# Altium PCB Remote_Control.PcbDoc
Units mil, origin at the board's own origin, x right, y up, seen from the top; angles counter-clockwise.
Board outline 6000 x 3000 mil, 4 copper layers (Top Layer, 3V3 Plane, GND Plane, Bottom Layer), stack 30.634 mil thick; 109 components, 80 nets, 428 pads, 143 vias.
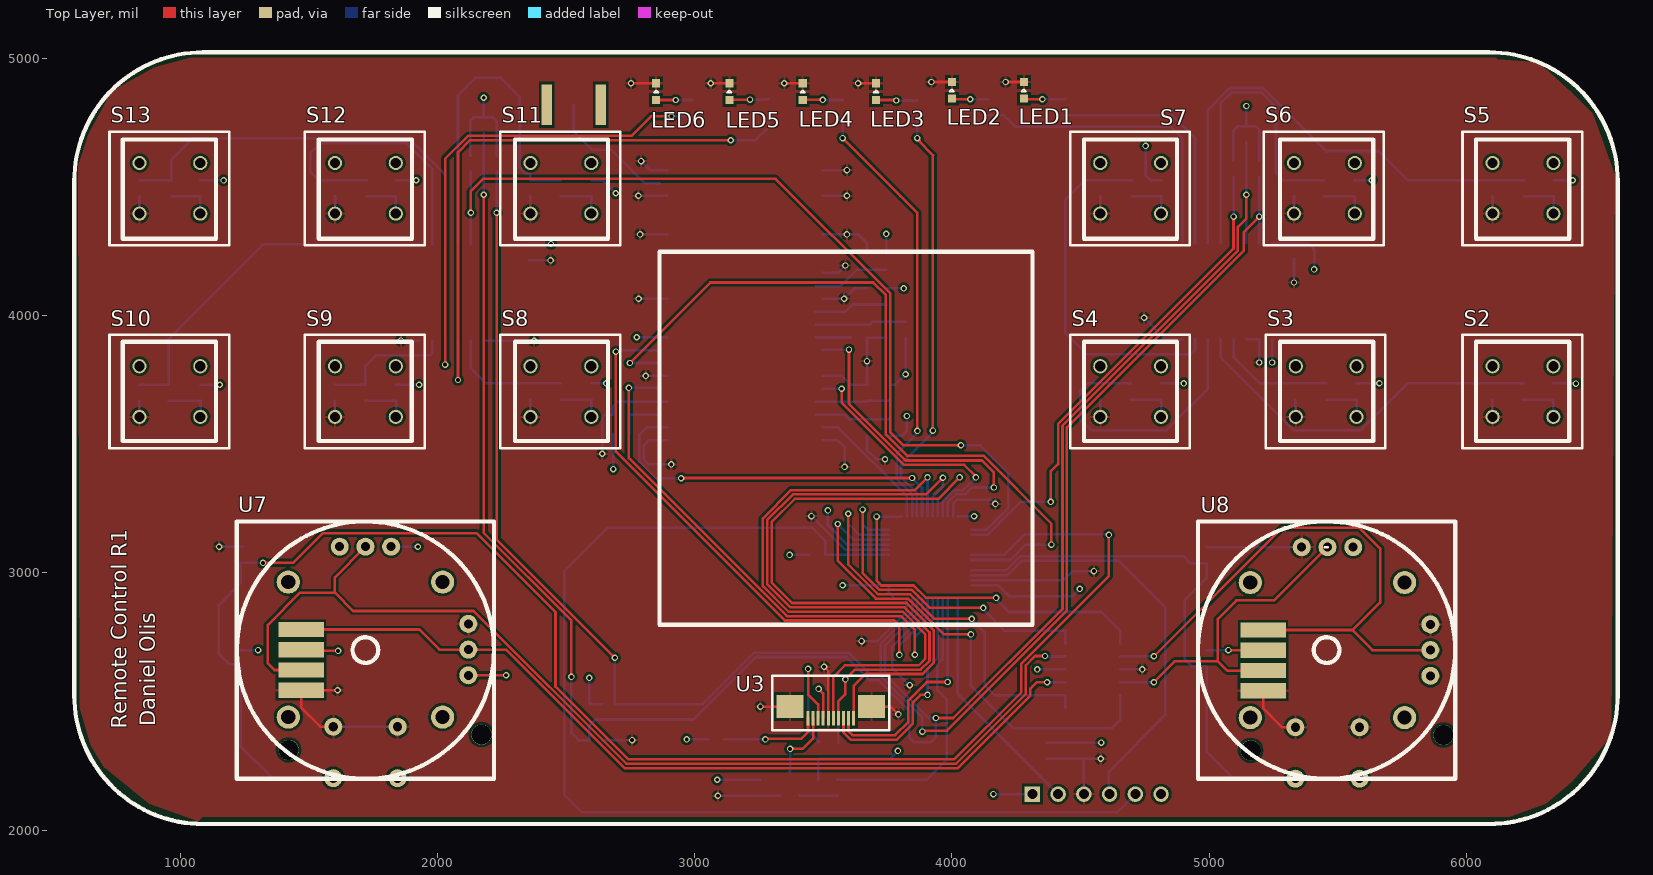
[diagram p0: Top Layer view]
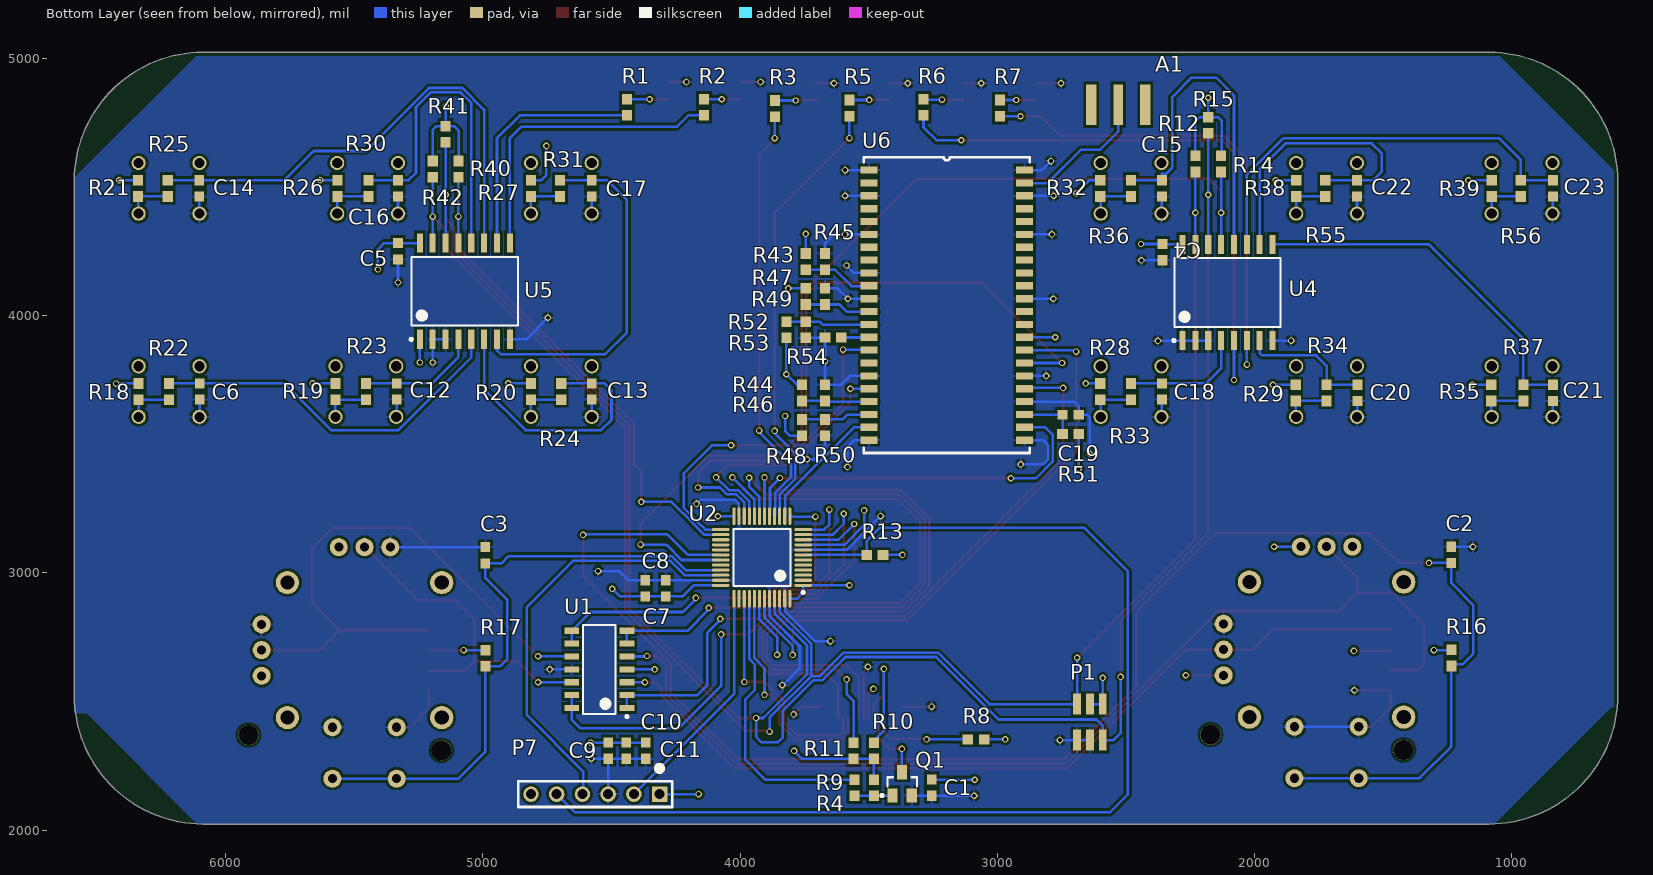
[diagram p1: Bottom Layer view, seen from below]
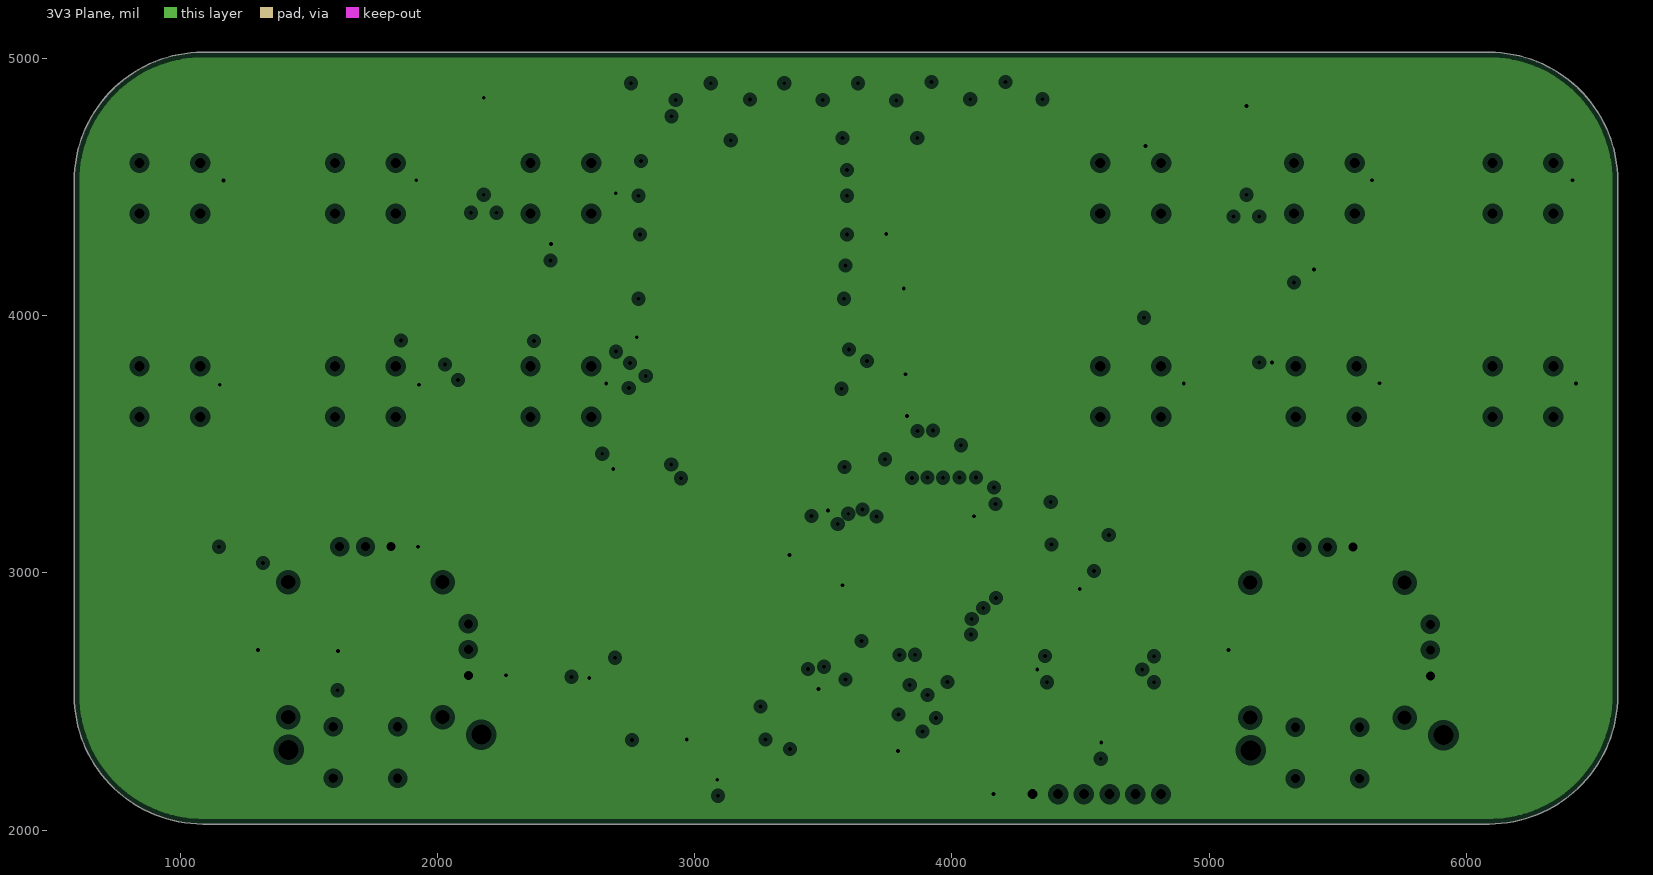
[diagram p2: 3V3 Plane, clearances drawn from the general rule]
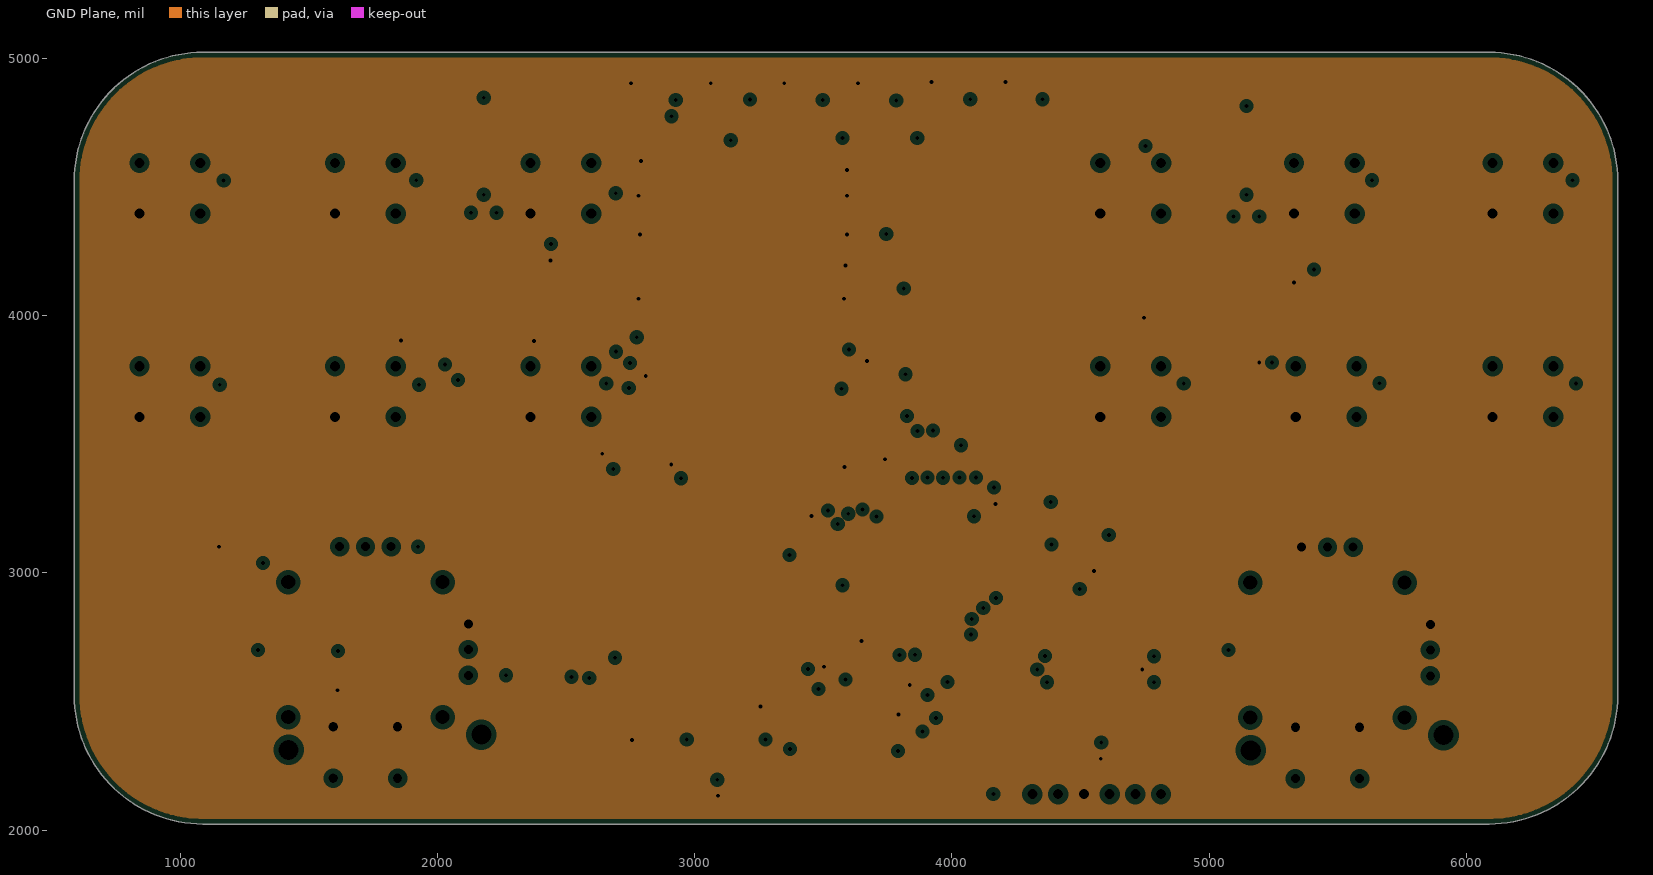
[diagram p3: GND Plane, clearances drawn from the general rule]

## Layer stack, top to bottom
Top Solder: solder mask 0.4, Solder Resist, Dk 3.5
Top Layer: signal copper 1.4
Dielectric 1: core 10, FR-4, Dk 4.2
3V3 Plane: plane copper 1.417, net 3V3
Dielectric 3: prepreg 5, Dk 4.2
GND Plane: plane copper 1.417, net GND
Dielectric 2: core 10, Dk 4.2
Bottom Layer: signal copper 1.4
Bottom Solder: solder mask 0.4, Solder Resist, Dk 3.5

## Board outline
1088.28,2023.84 cw(c1088.28,2523.84) 588.28,2523.84 588.28,4523.84 cw(c1088.28,4523.84) 1088.28,5023.84 6088.28,5023.84 cw(c6088.28,4523.84) 6588.28,4523.84 6588.28,2523.84 cw(c6088.28,2523.84) 6088.28,2023.84

## Design rules (kind name [scope] priority, off if disabled: settings)
Clearance [All] p1: gap=10 ignorepadtopadclearanceinfootprint=FALSE except(0: Arc-Hole Track-Hole SMDPad-Hole THPad-Hole Via-Hole Fill-Hole Poly-Hole Region-Hole Text-Hole; 7: Arc-Arc Arc-Track Arc-SMDPad Track-Track Track-SMDPad SMDPad-SMDPad)
Height [All] p1: minheight=0 maxheight=2000 prefheight=500
PlaneClearance [All] p1: clearance=20
PlaneConnect [All] p1: planeconnectstyle=Relief reliefexpansion=20 reliefentries=4 reliefconductorwidth=10 reliefairgap=10
PolygonConnect [All] p1: connectstyle=Relief reliefconductorwidth=10 reliefentries=4 polygonreliefangle="90 Angle" airgapwidth=10
RoutingVias [All] p1: holewidth=15 width=25 viastyle="Through Hole" minholewidth=15 minwidth=25 maxholewidth=28 maxwidth=50
SolderMaskExpansion [All] p1: expansion=4
Width [All] p1: maxlimit=10 minlimit=10 preferedwidth=10
27 further rules are at their usual default settings.

## Classes and differential pairs
component class U_Remote_Control: C4 C5 C7 C8 C9 C10 C11 P7 R12 R13 R14 R15 R40 R41 R42 U2 U4 U5
component class "U_Radio Module": A1 C19 R43 R44 R45 R46 R47 R48 R49 R50 R51 R52 R53 R54 U6
component class U_Power: P1
component class U_Outputs: C1 LED1 LED2 LED3 LED4 LED5 LED6 Q1 R1 R2 R3 R4 R5 R6 R7 R8 R9 R10 R11 U3
component class U_Inputs: C2 C3 R16 R17 U1 U7 U8
component class U_Buttons: C6 C12 C13 C14 C15 C16 C17 C18 C20 C21 C22 C23 R18 R19 R20 R21 R22 R23 R24 R25 R26 R27 R28 R29 R30 R31 R32 R33 R34 R35 R36 R37 R38 R39 R55 R56 S2 S3 S4 S5 S6 S7 S8 S9 S10 S11 S12 S13

## Components (designator, comment, footprint, x,y, rotation, side; value= is the part's Value field where it differs from the comment)
A1 "CON-SMA-EDGE-S" CON-SMA-EDGE-S 2530,4820 r180 bottom
C1 "Cap" CAPC0603 3255,2165 r270 bottom value=100nF
C2 "Cap" CAPC0603 1235,3070.39 r90 bottom value=100nF
C3 "Cap" CAPC0603 4990,3068.5 r90 bottom value=100nF
C4 "Cap" CAPC0603 2358,4247 r270 bottom value=100nF
C5 "Cap" CAPC0603 5330,4250.51 r270 bottom value=100nF
C6 "Cap" CAPC0603 6100,3705 r270 bottom value=100nF
C7 "Cap" CAPC0603 4368,2940 r90 bottom value=100nF
C8 "Cap" CAPC0603 4289,2940 r90 bottom value=10nF
C9 "Cap" CAPC0603 4512,2309 r270 bottom value=100nF
C10 "Cap" CAPC0603 4442,2309 r270 bottom value=100nF
C11 "Cap" CAPC0603 4367,2309 r270 bottom value=100nF
C12 "Cap" CAPC0603 5335,3705 r270 bottom value=100nF
C13 "Cap" CAPC0603 4576.89,3705 r270 bottom value=100nF
C14 "Cap" CAPC0603 6101.89,4495 r270 bottom value=100nF
C15 "Cap" CAPC0603 2360,4495 r270 bottom value=100nF
C16 "Cap" CAPC0603 5330,4495 r270 bottom value=100nF
C17 "Cap" CAPC0603 4576.89,4495 r270 bottom value=100nF
C18 "Cap" CAPC0603 2360,3705 r270 bottom value=100nF
C19 "Cap" CAPC0603 2715,3615 r180 bottom value=10uF
C20 "Cap" CAPC0603 1600,3700 r270 bottom value=100nF
C21 "Cap" CAPC0603 840,3700 r270 bottom value=100nF
C22 "Cap" CAPC0603 1601.89,4495 r270 bottom value=100nF
C23 "Cap" CAPC0603 840,4495 r270 bottom value=100nF
LED1 "LED" LED0603 4280,4875.98 r90 top
LED2 "LED" LED0603 4000,4875.98 r90 top
LED3 "LED" LED0603 3705,4870.98 r90 top
LED4 "LED" LED0603 3420,4870.98 r90 top
LED5 "LED" LED0603 3135,4870.98 r90 top
LED6 "LED" LED0603 2850,4870.98 r90 top
P1 "Amphenol 20021321-00006C4LF" "Amphenol FCI 20021321-00006C4LF - duplicate" 2640,2420 r270 bottom
P7 "SWD" SWD_STM32 4313,2140 r270 bottom
Q1 "MMBT3904" MMBT3904 3370,2180 r90 bottom
R1 "Res" RES0603 4440,4810 r90 bottom value=73R2
R2 "Res" RES0603 4140,4810 r90 bottom value=73R2
R3 "Res" RES0603 3865,4805 r90 bottom value=73R2
R4 "Res" RES0603 3480,2308.5 r270 bottom value=DNI
R5 "Res" RES0603 3575,4807.01 r90 bottom value=73R2
R6 "Res" RES0603 3287.01,4810 r90 bottom value=73R2
R7 "Res" RES0603 2990,4807.01 r90 bottom value=73R2
R8 "Res" RES0603 3083,2353 r0 bottom value=6R8
R9 "Res" RES0603 3558.74,2308.5 r270 bottom value=10k
R10 "Res" RES0603 3480,2165 r90 bottom value=100k
R11 "Res" RES0603 3555,2165 r270 bottom value=4k7
R12 "Res" RES0603 2230,4590 r90 bottom value=1k
R13 "Res" RES0603 3476,3070 r0 bottom value=1k
R14 "Res" RES0603 2130,4590 r270 bottom value=1k
R15 "Res" RES0603 2180,4740 r270 bottom value=1k
R16 "Res" RES0603 1235,2669.76 r90 bottom value=10k
R17 "Res" RES0603 4990,2668.5 r90 bottom value=10k
R18 "Res" RES0603 6338.11,3705 r270 bottom value=10k
R19 "Res" RES0603 5573.11,3705 r270 bottom value=10k
R20 "Res" RES0603 4813.11,3705 r270 bottom value=10k
R21 "Res" RES0603 6340,4495 r270 bottom value=10k
R22 "Res" RES0603 6220,3705 r90 bottom value=10k
R23 "Res" RES0603 5455,3705 r90 bottom value=10k
R24 "Res" RES0603 4695,3705 r90 bottom value=10k
R25 "Res" RES0603 6225,4495 r90 bottom value=10k
R26 "Res" RES0603 5565,4495 r270 bottom value=10k
R27 "Res" RES0603 4813.11,4495 r270 bottom value=10k
R28 "Res" RES0603 2600,3705 r270 bottom value=10k
R29 "Res" RES0603 1840,3700 r270 bottom value=10k
R30 "Res" RES0603 5445,4495 r90 bottom value=10k
R31 "Res" RES0603 4700,4495 r90 bottom value=10k
R32 "Res" RES0603 2600,4495 r270 bottom value=10k
R33 "Res" RES0603 2480,3705 r90 bottom value=10k
R34 "Res" RES0603 1720,3700 r90 bottom value=10k
R35 "Res" RES0603 1080,3700 r270 bottom value=10k
R36 "Res" RES0603 2480,4495 r90 bottom value=10k
R37 "Res" RES0603 955,3700 r90 bottom value=10k
R38 "Res" RES0603 1838.11,4495 r270 bottom value=10k
R39 "Res" RES0603 1078.11,4495 r270 bottom value=10k
R40 "Res" RES0603 5095,4570 r270 bottom value=1k
R41 "Res" RES0603 5145,4705 r270 bottom value=1k
R42 "Res" RES0603 5195,4570 r90 bottom value=1k
R43 "Res" RES0603 3745,4210 r270 bottom value=DNP
R44 "Res" RES0603 3760,3700 r270 bottom value=DNP
R45 "Res" RES0603 3670,4210 r90 bottom value=DNP
R46 "Res" RES0603 3670,3700 r90 bottom value=DNP
R47 "Res" RES0603 3745,4075 r270 bottom value=DNP
R48 "Res" RES0603 3760,3565 r90 bottom value=DNP
R49 "Res" RES0603 3670,4075 r90 bottom value=DNP
R50 "Res" RES0603 3670,3565 r270 bottom value=DNP
R51 "Res" RES0603 2715,3540 r180 bottom value=10R
R52 "Res" RES0603 3820,3945 r90 bottom value=DNP
R53 "Res" RES0603 3745,3945 r270 bottom value=DNP
R54 "Res" RES0603 3638.5,3915 r180 bottom value=DNP
R55 "Res" RES0603 1725,4495 r90 bottom value=10k
R56 "Res" RES0603 965,4495 r90 bottom value=10k
S2 "PVA1 OA H2 1.2N V2" "PVA1 OA H2 1.2N V2" 6220,3705 r0 top
S3 "PVA1 OA H2 1.2N V2" "PVA1 OA H2 1.2N V2" 5455,3705 r0 top
S4 "PVA1 OA H2 1.2N V2" "PVA1 OA H2 1.2N V2" 4695,3705 r0 top
S5 "PVA1 OA H2 1.2N V2" "PVA1 OA H2 1.2N V2" 6220,4495 r0 top
S6 "PVA1 OA H2 1.2N V2" "PVA1 OA H2 1.2N V2" 5448.11,4495 r0 top
S7 "PVA1 OA H2 1.2N V2" "PVA1 OA H2 1.2N V2" 4695,4495 r0 top
S8 "PVA1 OA H2 1.2N V2" "PVA1 OA H2 1.2N V2" 2480,3705 r0 top
S9 "PVA1 OA H2 1.2N V2" "PVA1 OA H2 1.2N V2" 1720,3705 r0 top
S10 "PVA1 OA H2 1.2N V2" "PVA1 OA H2 1.2N V2" 960,3705 r0 top
S11 "PVA1 OA H2 1.2N V2" "PVA1 OA H2 1.2N V2" 2480,4495 r0 top
S12 "PVA1 OA H2 1.2N V2" "PVA1 OA H2 1.2N V2" 1720,4495 r0 top
S13 "PVA1 OA H2 1.2N V2" "PVA1 OA H2 1.2N V2" 960,4495 r0 top
U1 "MCP6L04" MCP6L04T-E/SL 4737.28,2631 r0 bottom
U2 "STM32F072CB" STM32F072CB 3915,3060 r0 bottom
U3 "SFV10R-2STE1HLF" SFV10R-2STE1HLF 3529.21,2503.9 r180 top
U4 "TCA9534DWT" TCA9534DWT 2105,4090 r90 bottom
U5 "TCA9534DWT" TCA9534DWT 5070,4095 r90 bottom
U6 "TRM-900-NT" TRM-900-NT 3499,4566 r180 bottom
U7 "COM-09032" JOYSTICK 1770.12,2661.89 r90 top
U8 "COM-09032" JOYSTICK 5510,2660 r90 top

## Footprints (in the part's own frame and the unit in brackets; to place one, negate y for a bottom-side part, rotate by r counter-clockwise, add the part's x,y. Pads: shape width x height; smd on the part's side, far side on the other; paste and mask are expansions set on the pad)
"Amphenol FCI 20021321-00006C4LF - duplicate" [mm] "6 Position Receptacle Connector"
  rect 2.05x0.76 smd: 1(-1.775,1.27) 2(-1.775,0) 3(-1.775,-1.27) 4(1.775,1.27) 5(1.775,0) 6(1.775,-1.27)
  body extent -2.3,-2.11 2.2,2.16, height 4.51
CAPC0603 [mm] "Chip Capacitor, 2-Leads, Body 1.60x0.80mm, IPC Medium Density"
  rect 1x0.95 smd: 1(-0.8,0) 2(0.8,0)
  body extent -0.88,-0.48 0.87,0.48, height 0.8
CON-SMA-EDGE-S [mm] "CONN SMA JACK STR EDGE MNT"
  rect 0.96x4 smd: 0(0,0)
  rect 1.01x4 smd far side: 1(-2.667,0) 1(2.667,0)
  rect 1.01x4 smd: 1(-2.667,0) 1(2.667,0)
  body extent -3.18,-2.26 3.2,5.13, height 6.35
JOYSTICK [mil] "Footprint for COM-09426 and COM-09032"
  round 70 / inner round 60 / far side round 70 hole 35: 1(-60,-350) 1(440,-50) 2(140,-350) 2(440,150) 3(40,-350) 4(440,50)
  rect 59.06x177.17 smd: 1(39.37,300.12) 2(-118.11,300.12) 3(118.11,300.12) 4(-39.37,300.12)
  round 70 / inner round 60 / far side round 70 hole 35.43: 5(-260,-75) 5(-260,175) 6(-460,-75) 6(-460,175)
  round 78.74 hole 78.74 unplated: 7(-350,348.74) 7(-290.35,-401.06)
  round 90 / inner round 60 / far side round 90 hole 55: 7(-222.5,350) 7(-222.5,-250) 7(302.5,-250) 7(302.5,350)
  body extent -495,-472 592,578, height 1190
LED0603 [mm] "Chip LED, 2-Leads, Body 1.60x0.80mm, IPC Medium Density"
  rect 0.8x0.8 smd: A(-0.825,0) C(0.825,0)
  silkscreen extent -0.13,-0.25 0.12,0.25, body extent -0.88,-0.48 0.87,0.47, height 0.8
MCP6L04T-E/SL [mm] "IC OPAMP GP 1MHZ RRO 14SOIC"
  rect 1.45x0.6 smd: 1(-7.551,3.962) 2(-7.551,2.692) 3(-7.551,1.422) 4(-7.551,0.152) 5(-7.551,-1.118) 6(-7.551,-2.388) 7(-7.551,-3.658) 8(-2.101,-3.658) 9(-2.101,-2.388) 10(-2.101,-1.118) 11(-2.101,0.152) 12(-2.101,1.422) 13(-2.101,2.692) 14(-2.101,3.962)
  silkscreen extent -7.68,-4.25 -3.23,4.94, body extent -6.83,-4.25 -2.83,4.55, height 1.75
MMBT3904 [mm] "SOT23, 3-Leads, Body 2.92x2.40mm, Pitch 0.95mm, IPC Medium Density"
  rect 1.4x1 smd: B(-1.15,0.95) C(1.15,0) E(-1.15,-0.95)
  silkscreen extent -1.27,-1.45 0.65,2.13, body extent -0.65,-1.46 0.65,1.46, height 1.2
"PVA1 OA H2 1.2N V2" [mm]
  round 1.4 hole 1: 1(-3,2.5) 2(3,2.5) 3(-3,-2.5) 4(3,-2.5)
  silkscreen extent -5.97,-5.6 5.84,5.59, body extent -4.57,-4.57 4.57,4.57, height 16
RES0603 [mm] "Chip Resistor, 2-Leads, Body 1.60x0.80mm, IPC Medium Density"
  rect 1.05x1 smd: 1(-0.8,0) 2(0.8,0)
  body extent -0.88,-0.48 0.87,0.47, height 0.8
SFV10R-2STE1HLF [mm] "CONN FFC TOP 10POS 0.50MM R/A"
  rect 2.65x2.3 smd: 0(-4.025,0.6) 0(4.025,0.6)
  rect 0.3x1.4 smd: 1(-2.25,1.75) 2(-1.75,1.75) 3(-1.25,1.75) 4(-0.75,1.75) 5(-0.25,1.75) 6(0.25,1.75) 7(0.75,1.75) 8(1.25,1.75) 9(1.75,1.75) 10(2.25,1.75)
  silkscreen extent -5.77,-2.46 5.79,2.92
STM32F072CB [mm] "TSQFP, 48-Leads, Body 7.00x7.00mm, Pitch 0.50mm, IPC Medium Density"
  oval 1.75x0.3 smd: 1(-4.075,2.75) 2(-4.075,2.25) 3(-4.075,1.75) 4(-4.075,1.25) 5(-4.075,0.75) 6(-4.075,0.25) 7(-4.075,-0.25) 8(-4.075,-0.75) 9(-4.075,-1.25) 10(-4.075,-1.75) 11(-4.075,-2.25) 12(-4.075,-2.75) 25(4.075,-2.75) 26(4.075,-2.25) 27(4.075,-1.75) 28(4.075,-1.25) 29(4.075,-0.75) 30(4.075,-0.25) 31(4.075,0.25) 32(4.075,0.75) 33(4.075,1.25) 34(4.075,1.75) 35(4.075,2.25) 36(4.075,2.75)
  oval 0.3x1.75 smd: 13(-2.75,-4.075) 14(-2.25,-4.075) 15(-1.75,-4.075) 16(-1.25,-4.075) 17(-0.75,-4.075) 18(-0.25,-4.075) 19(0.25,-4.075) 20(0.75,-4.075) 21(1.25,-4.075) 22(1.75,-4.075) 23(2.25,-4.075) 24(2.75,-4.075) 37(2.75,4.075) 38(2.25,4.075) 39(1.75,4.075) 40(1.25,4.075) 41(0.75,4.075) 42(0.25,4.075) 43(-0.25,4.075) 44(-0.75,4.075) 45(-1.25,4.075) 46(-1.75,4.075) 47(-2.25,4.075) 48(-2.75,4.075)
  silkscreen extent -4.2,-2.8 2.8,3.57, body extent -3.5,-3.5 3.5,3.5, height 1.6
SWD_STM32 [mil] "SWD connector matching the pinout on STM Discovery Boards"
  rect 60x60 hole 39.37: 1(0,0)
  round 60 hole 39.37: 2(0,-100) 3(0,-200) 4(0,-300) 5(0,-400) 6(0,-500)
  silkscreen extent -110,-550 50,50
TCA9534DWT [mm] "IC I/O EXPANDER I2C 8B 16SOIC"
  rect 1.9x0.6 smd: 1(-4.75,4.445) 2(-4.75,3.175) 3(-4.75,1.905) 4(-4.75,0.635) 5(-4.75,-0.635) 6(-4.75,-1.905) 7(-4.75,-3.175) 8(-4.75,-4.445) 9(4.75,-4.445) 10(4.75,-3.175) 11(4.75,-1.905) 12(4.75,-0.635) 13(4.75,0.635) 14(4.75,1.905) 15(4.75,3.175) 16(4.75,4.445)
  silkscreen extent -4.87,-5.25 3.4,5.42, body extent -3.8,-5.25 3.8,5.25, height 2.65
TRM-900-NT [mil] "RF TXRX MODULE ISM<1GHZ"
  rect 65x28 smd: 1(0,0) 2(0,-50) 3(0,-100) 4(0,-150) 5(0,-200) 6(0,-250) 7(0,-300) 8(0,-350) 9(0,-400) 10(0,-450) 11(0,-500) 12(0,-550) 13(0,-600) 14(0,-650) 15(0,-700) 16(0,-750) 17(0,-800) 18(0,-850) 19(0,-900) 20(0,-950) 21(0,-1000) 22(0,-1050) 23(605,-1050) 24(605,-1000) 25(605,-950) 26(605,-900) 27(605,-850) 28(605,-800) 29(605,-750) 30(605,-700) 31(605,-650) 32(605,-600) 33(605,-550) 34(605,-500) 35(605,-450) 36(605,-400) 37(605,-350) 38(605,-300) 39(605,-250) 40(605,-200) 41(605,-150) 42(605,-100) 43(605,-50) 44(605,0)
  silkscreen extent -20,-1100 625,50

## Part data
A1: "CONN SMA JACK STR EDGE MNT"
C1 C2 C3 C4 C5 C6 C7 C9 C10 C11 C12 C13 C14 C15 C16 C17 C18 C20 C21 C22 C23: Supplier Part Number 1=1276-1000-1-ND, Supplier 1=Digi-Key
C8: Supplier Part Number 1=1276-6841-1-ND, Supplier 1=Digi-Key
C19: Supplier Part Number 1=1276-1192-1-ND, Supplier 1=Digi-Key
LED1: Color=Red, Supplier Part Number 1=754-1122-1-ND, Supplier 1=Digi-Key
LED2: Color=Green, Supplier Part Number 1=754-1122-1-ND, Supplier 1=Digi-Key
LED3: Color=Yellow, Supplier Part Number 1=754-1122-1-ND, Supplier 1=Digi-Key
LED4: Color=Pink, Supplier Part Number 1=754-1122-1-ND, Supplier 1=Digi-Key
LED5: Color=Orange, Supplier Part Number 1=754-1122-1-ND, Supplier 1=Digi-Key
LED6: Color=Blue, Supplier Part Number 1=754-1122-1-ND, Supplier 1=Digi-Key
P1: library part "Amphenol FCI 20021321-00006C4LF", "6 Position Receptacle Connector 0.050\" (1.27mm) Surface Mount Gold", Manufacturer 1="Amphenol FCI", Manufacturer Part Number 1=20021321-00006C4LF, Supplier Part Number 1=609-3704-1-ND, ComponentLink1Description=Website, Supplier 1=Digi-Key
P7: library part SWD_STM32, "SWD connector matching the pinout on STM Discovery Boards"
Q1: "TRANS NPN 40V 0.2A SOT-23", Manufacturer 1="Fairchild Semiconductor", Supplier Part Number 1=MMBT3904FSCT-ND, Manufacturer Part Number 1=MMBT3904, Supplier 1=Digi-Key
R1 R2 R3 R5 R6 R7: Supplier Part Number 1=RMCF0603FT73R2CT-ND, Supplier 1=Digi-Key
R4 R12 R14 R15 R43 R44 R45 R46 R47 R48 R49 R50 R52 R53 R54: Supplier Part Number 1=RMCF0603JT10K0CT-ND, Supplier 1=Digi-Key
R8: Supplier Part Number 1=RMCF0603FT6R80CT-ND, Supplier 1=Digi-Key
R9 R16 R17 R18 R19 R20 R21 R22 R23 R24 R25 R26 R27 R28 R29 R30 R31 R32 R33 R34 R35 R36 R37 R38 R39 R55 R56: Supplier Part Number 1=RMCF0603FT10K0CT-ND, Supplier 1=Digi-Key
R10: Supplier Part Number 1=RMCF0603FG100KCT-ND, Supplier 1=Digi-Key
R11: Supplier Part Number 1=RMCF0603FT4K70CT-ND, Supplier 1=Digi-Key
R13 R40 R41 R42: Supplier Part Number 1=RMCF0603FG1K00CT-ND, Supplier 1=Digi-Key
R51: Supplier Part Number 1=RMCF0603FT10R0CT-ND, Supplier 1=Digi-Key
S2 S3 S4 S5 S6 S7 S8 S9 S10 S11 S12 S13: "Pushbutton Switch DPST-NO Keyswitch Through Hole", Manufacturer=C&K, Supplier Part Number 1=401-1135-ND, ComponentLink1Description=Datasheet, ComponentLink1URL=https://www.ckswitches.com/media/1343/pva.pdf, Manufacturer Part Number="PVA1 OA H2 1.2N V2", Supplier 1=Digi-Key
U1: "Quad Op Amp Rail-to-Rail 1Mhz", Supplier 1=Digi-Key
U2: "MCU 32BIT 128KB FLASH 48LQFP", Supplier Part Number 1=497-14645-ND, Supplier 1=Digi-Key
U3: "CONN FFC TOP 10POS 0.50MM R/A", Manufacturer 1="Amphenol FCI", Supplier Part Number 1=609-4306-1-ND, ComponentLink1Description="\"Datasheet\"", ComponentLink1URL=https://cdn.amphenol-icc.com/media/wysiwyg/files/drawing/10112793.pdf, ComponentLink2URL=https://www.digikey.com/product-detail/en/amphenol-fci/SFV10R-2STE1HLF/609-4306-1-ND/2626757, Manufacturer Part Number 1=SFV10R-2STE1HLF, Supplier 1=Digi-Key
U4 U5: "IC I/O EXPANDER I2C 8B 16-SOIC", Manufacturer 1="Texas Instruments", Supplier Part Number 1=296-45201-1-ND, ComponentLink1Description=Datasheet, ComponentLink1URL=http://www.ti.com/lit/ds/symlink/tca9534.pdf, ComponentLink2Description=Website, ComponentLink2URL=http://www.ti.com/product/TCA9534/technicaldocuments, Manufacturer Part Number 1=TCA9534DWT, Supplier 1=Digi-Key
U6: "RF TXRX MODULE ISM<1GHZ", Manufacturer 1=Linx, Supplier Part Number 1=TRM-900-NT-ND, Manufacturer Part Number 1=TRM-900-NT, Supplier 1=Digi-Key
U7 U8: "2 Axis 10 kOhms Through Hole Joystick Potentiometer", Manufacturer 1="SparkFun Electronics", Supplier Part Number 1=1568-1526-ND, ComponentLink1=Datasheet, ComponentLink1URL=https://media.digikey.com/pdf/Data%20Sheets/Sparkfun%20PDFs/COM-09032_Web.pdf, ComponentLink2URL=https://www.sparkfun.com/products/9032, Manufacturer Part Number 1=COM-09032, Supplier 1=Digi-Key

## Via types
v1: diameter 25, hole 15, Top Layer to Bottom Layer, 143 vias

## Nets (pads, with @x,y where several pads share a name; then routed paths per layer and width w, separated by ;. In a path a pad name is that pad's centre, name@x,y a point inside that pad or via, vN(x,y) a via of type N, cw(c..) or ccw(c..) an arc to the next point about the centre after c; other vN are vias at no path point)
3V3: C1.1 C4.1 C5.1 C7.1 C8.1 C9.1 C10.1 C11.1 P1.1 P1.2 P7.1 R4.2 R8.1 R9.2 R10.2 R12.2 R13.1 R14.1 R15.1 R16.2 R17.2 R18.1 R19.1 R20.1 R21.1 R26.1 R27.1 R28.1 R29.1 R32.1 R35.1 R38.1 R39.1 R40.1 R41.1 R42.2 R43.1 R44.1 R47.1 R48.1 R51.2 R52.1 U1.4 U2.1 U2.9 U2.24 U2.36 U2.48 U3.7 U4.16 U5.1 U5.16 U6.31 U7.1 U8.1 | length 6510.7
  Top Layer w10: U7.1@1470,2701.26 1474.26,2697 v1(1614,2697) ; U7.1@2120.12,2601.89 v1(2266.89,2601.89) ; v1(3482,2549) 3499.69,2531.32 U3.7 ; v1(5075,2700) 5075.63,2699.37 U8.1@5209.88,2699.37
  Bottom Layer w10: R39.1 1168.5,4526.5 v1(1169,4526) ; R35.1 v1(1153.5,3731.5) ; R16.2 1236.26,2700 v1(1303,2700) ; U7.1@1820.12,3101.89 v1(1923.89,3101.89) ; R38.1 v1(1917.5,4526.5) ; R29.1 v1(1928.5,3731.5) ; R14.1 2127,4624.5 2127,4757 2141.5,4771.5 R15.1 ; v1(2180,4847) R15.1 ; R12.2 2230,4756 2214.5,4771.5 R15.1 ; U4.16 2356.51,4277.01 C4.1 v1(2441.5,4278.5) ; v1(2590,2592) P1.1 P1.2 ; R28.1 v1(2656.5,3736.5) ; R32.1 2642.5,4526.5 v1(2693,4476) ; v1(2683.5,3403.5) R51.2 ; v1(2775,3916) U6.31 ; v1(2969,2353) R8.1 ; v1(3088,2196) 3254.5,2196 C1.1 ; v1(3369,3070) R13.1 ; R10.2 R4.2 R9.2 3759.01,2277.01 v1(3790,2308) ; v1(3518,3243) 3518,3186 3594.79,3109.21 U2.9 ; v1(3575.27,2951.73) U2.1 3754.57,2923.43 3778.43,2899.57 U2.48 ; v1@3744,4319 v1(3745,4318) R43.1 ; R47.1 3812.5,4106.5 v1(3813,4106) ; R48.1 3807.5,3533.5 3825,3551 3825,3587 ; R44.1 3779.5,3731.5 v1(3820,3772) R52.1 ; v1(3825,3610) 3825,3587 ; 3826,3586 3825,3587 ; U2.24 v1(4086.43,3220.43) v1@4087,3221 ; U2.36 4180.27,2951.73 4223.5,2908.5 C8.1 C7.1 4466.5,2908.5 4496,2938 v1(4497,2938) ; v1(4161,2140) P7.1 ; v1(4332,2625) U1.4 ; C11.1 C10.1 C9.1 v1(4580.5,2340.5) ; v1(4753,4660) 4753,4546 4772.5,4526.5 R27.1 ; R20.1 v1(4901.5,3736.5) ; R17.2 v1(5075,2700) ; R40.1 5094,4602.5 5094,4719 5111.5,4736.5 R41.1 ; v1(5145,4815) R41.1 ; R42.2 5195,4721 5179.5,4736.5 R41.1 ; v1(5245,3818) U5.1 ; U5.16 C5.1 5383.99,4282.01 5408,4258 v1(5408,4180) ; R26.1 v1(5632.5,4526.5) ; R19.1 5661.5,3736.5 v1(5662,3737) ; R18.1 6425.5,3736.5 v1(6426,3736) ; R21.1 v1(6413,4526.5)
BAUD0: R44.2 R46.1 U6.19 | length 291.5
  Bottom Layer w10: U6.19@3470,3665 3666.5,3665 R46.1 R44.2
BAUD1: R48.2 R50.1 U6.20 | length 297.7
  Bottom Layer w10: U6.20@3470,3615 3583,3615 3601.5,3596.5 R50.1 R48.2
CHN_SEL0: R43.2 R45.1 U6.10 | length 301.3
  Bottom Layer w10: U6.10@3470,4115 3567,4115 3630.5,4178.5 R45.1 R43.2
CHN_SEL1: R47.2 R49.1 U6.12 | length 286.8
  Bottom Layer w10: U6.12@3470,4015 3585,4015 3613.5,4043.5 R49.1 R47.2
CHN_SEL2: R52.2 R53.1 U6.13 | length 354.8
  Bottom Layer w10: U6.13@3470,3965 3680,3965 3691.5,3976.5 R53.1 R52.2
EX1INT: R14.2 U2.25 U4.13 | length 3578.2
  Top Layer w10: v1(2130,4400) 2130,4484 2178,4532 3315,4532 3761,4086 3761,3546 3811,3496 v1(4035,3496)
  Bottom Layer w10: U4.13 v1(2130,4400) R14.2 ; v1(4035,3496) 4110,3496 4219,3387 4219,3253.04 4165,3199.04 4165,3198 4135.27,3168.27 U2.25
EX2INT: R40.2 U2.26 U5.13 | length 2022
  Top Layer w10: v1(4384,3276) 4384,3394 4413,3423 4413,3579.35 5094.57,4260.92 5094.57,4384.57 v1(5095,4385)
  Bottom Layer w10: U2.26 4139.62,3148.58 4182,3190.96 4182,3192 4266,3276 v1(4384,3276) ; U5.13 v1(5095,4385) R40.2
EXSCL: P1.4 R15.2 R41.2 U2.45 U4.14 U5.14 | length 8120.7
  Top Layer w10: v1(2180,4470) 2180,3155.96 2521,2814.96 v1(2521,2596) ; v1(3938,2436) 4003.96,2436 4004.96,2435 4430,2860.04 4430,3572.31 5111.57,4253.87 5111.57,4345 5145,4378.43 v1(5145,4470)
  Bottom Layer w10: U4.14 v1(2180,4470) R15.2 ; v1(2521,2596) 2521,2377 2547.88,2350.12 P1.4 2590,2405 2615,2430 2995,2430 3238,2673 3590.96,2673 3681.96,2582 3715.96,2582 3833.69,2464.26 3833.69,2414.26 3834,2413.96 3834,2361 3854,2341 3916,2341 3938,2363 v1(3938,2436) 3912.04,2436 3911.04,2435 3740,2606.04 3740,2716.96 3865.79,2842.75 U2.45 ; U5.14 v1(5145,4470) R41.2
EXSDA: P1.3 R12.1 R42.1 U2.46 U4.15 U5.15 | length 7027.7
  Top Layer w10: v1(2230,4400) 2230,3130 v1(2690,2670) ; v1(3885,2383) 3885,2387 3981,2387 4447,2853 4447,3565.26 5135,4253.26 5135,4325 v1(5195,4385)
  Bottom Layer w10: U4.15 v1(2230,4400) R12.1 ; v1(2690,2670) P1.3 3030.84,2489.88 3230.96,2690 3598,2690 3689,2599 3723,2599 ; U2.46 3846.1,2847.1 3723,2724 3723,2599 ; v1(3885,2383) 3885,2437 3723,2599 ; U5.15 v1(5195,4385) R42.1
GND: C1.2 C2.2 C3.2 C4.2 C5.2 C6.2 C7.2 C8.2 C9.2 C10.2 C11.2 C12.2 C13.2 C14.2 C15.2 C16.2 C17.2 C18.2 C19.2 C20.2 C21.2 C22.2 C23.2 LED1.C LED2.C LED3.C LED4.C LED5.C LED6.C P1.5 P1.6 P7.3 Q1.E R45.2 R46.2 R49.2 R50.2 R53.2 R54.1 S2.3 S3.3 S4.3 S5.3 S6.3 S7.3 S8.3 S9.3 S10.3 S11.3 S12.3 S13.3 U1.11 U2.8 U2.23 U2.35 U2.44 U2.47 U3.0 U3.6 U4.1 U4.2 U4.3 U4.8 U5.2 U5.3 U5.8 U6.1 U6.3 U6.6 U6.9 U6.11 U6.17 U6.22 U6.23 U6.26 U6.28 U6.34 U6.39 U6.42 U6.44 U7.2@1470,2543.78 U7.2@2120.12,2801.89 U7.5 U8.2 U8.5 | length 9027.9
  Top Layer w10: U7.5@1595.12,2401.89 1545.11,2401.89 1470,2477 1470,2543.78 v1(1611.78,2543.78) ; v1(2752.46,4903.46) LED6.C ; v1(3062.46,4903.46) LED5.C ; v1@3255,2481 v1(3255.72,2480.28) U3.0@3370.75,2480.28 ; v1(3348.46,4903.46) LED4.C ; v1(3503,2635) 3519.37,2618.63 U3.6 ; v1(3635.46,4903.46) LED3.C@3700,4903.46 ; U3.0@3687.68,2480.28 3761.72,2480.28 v1(3792,2450) ; LED3.C LED3.C@3700,4903.46 ; LED3.C@3705,4908.46 LED3.C@3700,4903.46 ; v1(3920.46,4908.46) LED2.C ; v1(4208.54,4908.46) LED1.C ; U8.2@5209.88,2541.89 5209.88,2474.12 5284,2400 U8.5@5335,2400
  Bottom Layer w10: C21.2 840,3608.46 S10.3 ; C23.2 840,4398.46 S13.3 ; v1@1150,3103 v1(1151.11,3101.89) C2.2 C2.2@1243.11,3101.89 ; U7.5@1595.12,2401.89 U7.5@1845.12,2401.89 ; C20.2 1600,3608.46 S9.3 ; S12.3 C22.2 ; v1(1858.01,3902.99) U4.8 ; U4.3 U4.2 U4.1 2375.01,3902.99 v1(2376,3902) ; C4.2 2439.5,4215.5 v1(2440,4215) ; C18.2 2360,3608.46 S8.3 ; C15.2 2360,4398.46 S11.3 ; P1.5 P1.6 v1(2756.88,2350.12) ; v1(2640.67,3463) 2640.67,3604.67 2651,3615 C19.2 2683.5,3648.5 2701,3666 U6.26 ; v1(2781,4466) U6.42 ; v1(2782,4066) U6.34 ; v1(2788,4316) U6.39 ; v1(2792,4601) 2827,4566 U6.44 ; v1(2810,3766) U6.28 ; U6.23 2823,3516 2802,3495 2802,3440.04 2820.04,3422 v1(2909,3422) ; v1(3090,2133.5) C1.2 3331.38,2133.5 Q1.E ; v1(3454,3221) 3585.47,3089.53 U2.8 ; U6.22 3556,3516 3583,3489 v1(3583,3412) ; U6.17 3572.5,3766 3607,3731.5 R46.2 v1(3670,3823.25) R54.1 3671.5,3913.5 R53.2 ; U6.11 v1(3581,4066) 3621.5,4106.5 R49.2 ; U6.9 3558,4166 3586,4194 v1(3586,4195) ; U6.6 v1(3592,4316) 3636,4316 3670,4282 R45.2 ; U6.3 v1(3592,4466) ; U6.1 v1(3592,4566) ; v1(3649,2735) 3709.96,2735 3824.64,2849.68 3824.64,2897.79 U2.47 ; R50.2 3670,3478.04 3706.04,3442 v1(3740,3442) ; v1(3836,2564) 3833,2564 3768.5,2628.5 3768.5,2714.54 3885.47,2831.51 U2.44 ; U2.23 4005.36,3222.21 4005.36,3271.32 4019.04,3285 4152,3285 v1(4169,3268) ; U2.35 4075.51,2971.5 C8.2 C7.2 4434.5,2971.5 4470,3007 v1(4552,3007) ; C11.2 C10.2 4511.99,2276.53 4511.99,2152.01 P7.3@4519,2145 ; C9.2 v1(4578.5,2277.5) ; S4.3 C13.2 ; S7.3 C17.2 ; U1.11 v1@4737,2625 ; v1@4734,2622 v1@4737,2625 ; v1(4740,2625) v1@4737,2625 ; v1(4747,3992) 4831.01,3907.99 U5.8 ; C3.2 U8.2@5360,3100 ; U5.3 U5.2 v1(5195,3818) ; v1(5330,4129) C5.2 ; S6.3 C16.2 ; C12.2 5335,3608.46 S3.3 ; C6.2 6100,3608.46 S2.3 ; S5.3 C14.2
LVL_ADJ: R54.2 U6.14 | length 137
  Bottom Layer w10: U6.14@3470,3915 R54.2
NetA1_0: A1.0 U6.43 | length 522.8
  Bottom Layer w10: A1.0 2530,4715 2600,4645 2675,4645 2805,4515 U6.43@2865,4515
NetC2_1: C2.1 R16.1 U2.30 U7.6 | length 6514
  Top Layer w10: v1(1322,3039) 1439,3039 1554,3154 2153,3154 2459,2848 2459,2558 2742,2275 4008.92,2275 4270,2536.08 4270,2647.57 4610,2987.57 v1(4610,3148)
  Bottom Layer w10: v1(1322,3039) 1321.9,3038.9 C2.1 1235,2960 1150,2875 1150,2685 1190,2645 1228.27,2645 R16.1 1235,2325 1358.11,2201.89 1595.12,2201.89 U7.6@1845.12,2201.89 ; U2.30 4202.41,3069.84 4282.57,3150 4608,3150 v1(4610,3148)
NetC3_1: C3.1 R17.1 U2.33 U8.6 | length 2422.9
  Bottom Layer w10: U2.33 4211.83,3010.79 4266.04,3065 4900.02,3065 4928.01,3037.01 C3.1 4990,2980 4905,2895 4905,2665 4932.99,2637.01 R17.1 4990,2305 5095,2200 5335,2200 U8.6@5585,2200
NetC6_1: C6.1 R22.2 U5.5 | length 1437.2
  Bottom Layer w10: U5.5 5045,3838.28 5328.28,3555 5590,3555 5771.5,3736.5 C6.1 R22.2
NetC12_1: C12.1 R23.2 U5.4 | length 470.9
  Bottom Layer w10: U5.4 5095,3840 5198.5,3736.5 C12.1 R23.2
NetC13_1: C13.1 R24.2 U5.6 | length 1091.8
  Bottom Layer w10: R24.2 C13.1 4526.5,3736.5 4500,3710 4500,3595 4540,3555 4835,3555 4995,3715 U5.6
NetC14_1: C14.1 R25.2 U5.11 | length 1931.7
  Bottom Layer w10: U5.11 4995,4800 5080,4885 5210.04,4885 5455.04,4640 5658,4640 5771.5,4526.5 C14.1 R25.2
NetC15_1: C15.1 R36.2 U4.12 | length 1347.9
  Bottom Layer w10: U4.12 2080,4856 2149,4925 2245,4925 2319.33,4850.67 2319.33,4575.8 2344.26,4550.87 2360,4550.87 C15.1 R36.2
NetC16_1: C16.1 R30.2 U5.12 | length 1252.8
  Bottom Layer w10: U5.12 5045,4825.96 5087.04,4868 5203,4868 5260,4811 5260,4555 5288.5,4526.5 C16.1 R30.2
NetC17_1: C17.1 R31.2 U5.7 | length 1396.1
  Bottom Layer w10: R31.2 C17.1 4516.5,4526.5 4440,4450 4440,3935 4525,3850 4930,3850 4945,3865 U5.7
NetC18_1: C18.1 R33.2 U4.4 | length 482.2
  Bottom Layer w10: U4.4 2130,3795 2188.5,3736.5 R33.2
NetC19_1: C19.1 R51.1 U6.25 | length 193.5
  Bottom Layer w10: R51.1 C19.1 U6.25@2865,3615
NetC20_1: C20.1 R34.2 U4.7 | length 522.2
  Bottom Layer w10: C20.1 R34.2 1720,3805 1760.98,3845.98 1970.98,3845.98 1980,3855 U4.7
NetC21_1: C21.1 R37.2 U4.9 | length 1420.5
  Bottom Layer w10: C21.1 R37.2 955,3910 1322.01,4277.01 U4.9
NetC22_1: C22.1 R55.2 U4.10 | length 1129.9
  Bottom Layer w10: R55.2 C22.1 1538.5,4526.5 1505,4560 1505,4630 1545,4670 1880,4670 1980,4570 U4.10
NetC23_1: C23.1 R56.2 U4.11 | length 1633.7
  Bottom Layer w10: C23.1 R56.2 965,4605 1050,4690 1888.28,4690 2030,4548.28 U4.11
NetLED1_A: LED1.A R1.2 | length 160.8
  Top Layer w10: LED1.A 4282.01,4841.5 v1(4351.5,4841.5)
  Bottom Layer w10: v1(4351.5,4841.5) R1.2
NetLED2_A: LED2.A R2.2 | length 140.8
  Top Layer w10: LED2.A 4002.01,4841.5 v1(4071.5,4841.5)
  Bottom Layer w10: v1(4071.5,4841.5) R2.2
NetLED3_A: LED3.A R3.2 | length 167.9
  Top Layer w10: LED3.A LED3.A@3710,4838.5 ; LED3.A@3705,4843.5 LED3.A@3710,4838.5 ; v1(3783.5,4836.5) 3781.49,4838.5 LED3.A@3710,4838.5
  Bottom Layer w10: v1(3783.5,4836.5) R3.2
NetLED4_A: LED4.A R5.2 | length 155.4
  Top Layer w10: LED4.A 3420.5,4839 v1(3498,4839)
  Bottom Layer w10: v1(3498,4839) 3498.5,4838.5 R5.2
NetLED5_A: LED5.A R6.2 | length 153.2
  Top Layer w10: LED5.A 3136.5,4840 v1(3215,4840)
  Bottom Layer w10: v1(3215,4840) 3275,4840 3276.5,4841.5 R6.2
NetLED6_A: LED6.A R7.2 | length 140
  Top Layer w10: LED6.A v1(2926.5,4838.5)
  Bottom Layer w10: v1(2926.5,4838.5) R7.2
NetQ1_B: Q1.B R10.1 R11.2 | length 148.1
  Bottom Layer w10: Q1.B 3408.62,2133.5 R10.1 R11.2
NetQ1_C: Q1.C U3.9 | length 277.5
  Top Layer w10: v1(3371,2316) 3420,2316 3460.31,2356.32 U3.9
  Bottom Layer w10: Q1.C 3368,2227.28 3371,2230.28 v1(3371,2316)
NetR1_1: R1.1 U5.10 | length 952.7
  Bottom Layer w10: R1.1@4437,4778.5 4856.5,4778.5 4945,4690 U5.10
NetR2_1: R2.1 U5.9 | length 1199.7
  Bottom Layer w10: R2.1 4201.5,4778.5 4245,4735 4850,4735 4895,4690 U5.9
NetR3_1: R3.1 U2.16 | length 1666.1
  Top Layer w10: v1(3865,4690) 3875.79,4679.21 ; v1@3865.79,4684.21 3927,4623 3926,4622 v1(3926,3553)
  Bottom Layer w10: v1(3865,4690) R3.1 ; U2.16 3864.01,3222.21 3864.01,3311.1 3848.51,3326.6 3802,3373.11 3802,3423.43 3926,3547.43 v1(3926,3553)
NetR4_1: R4.1 U3.8 | length 514.6
  Top Layer w10: v1(3441,2627) 3441,2528 3480,2489 U3.8
  Bottom Layer w10: v1(3441,2627) 3441,2387 3484,2344 R4.1
NetR5_1: R5.1 U2.15 | length 1734.5
  Top Layer w10: v1(3575,4690) 3800,4465 3866,4399 v1(3866,3552)
  Bottom Layer w10: v1(3575,4690) R5.1 ; U2.15 3846.1,3304.97 3785,3366.07 3785,3463 3866,3544 v1(3866,3552)
NetR6_1: R6.1 U4.5 | length 2336.6
  Top Layer w10: v1(2080,3750) 2080,4635 2127,4682 v1(3140,4682)
  Bottom Layer w10: v1(2080,3750) U4.5 ; v1(3140,4682) 3237,4682 3287.01,4732.01 R6.1 R6.1@3283.5,4775
NetR7_1: R7.1 U4.6 | length 1921.5
  Top Layer w10: v1(2030,3810) 2030,4610 2119,4699 2754,4699 2830,4775 v1(2910,4775)
  Bottom Layer w10: v1(2030,3810) U4.6 ; v1(2910,4775) 2910.51,4775.51 R7.1
NetR8_2: R8.2 U3.10 | length 391.9
  Top Layer w10: v1(3275,2353) 3278,2356 3415,2356 3440.63,2381.63 U3.10
  Bottom Layer w10: R8.2@3114,2353 R8.2 v1(3275,2353)
NetR9_1: R9.1 U2.19 U3.4 | length 2762.1
  Top Layer w10: U3.4 3558.74,2501.74 3586,2529 v1(3586,2586) 3624,2624 3878.61,2624 3913,2658.39 3913,2769.08 3816.08,2866 3372.12,2866 3282,2956.12 3282,3204.96 3382.04,3305 3900,3305 v1(3965,3370)
  Bottom Layer w10: R9.1 3558.74,2501.74 3586,2529 v1(3586,2586) ; U2.19 3924.84,3294.84 3965,3335 v1(3965,3370)
NetR11_1: R11.1 U2.40 | length 1106.8
  Bottom Layer w10: R11.1 3902.5,2196.5 3980,2274 3980,2507.57 3943,2544.57 3943,2643.57 3964.21,2664.78 U2.40
NetR18_2: R18.2 R22.1 S2.4 | length 185
  Bottom Layer w10: R22.1 R18.2 S2.4
NetR19_2: R19.2 R23.1 S3.4 | length 185
  Bottom Layer w10: R23.1 R19.2 S3.4
NetR20_2: R20.2 R24.1 S4.4 | length 185
  Bottom Layer w10: R24.1 R20.2 S4.4
NetR21_2: R21.2 R25.1 S5.4 | length 182.7
  Bottom Layer w10: R25.1 R21.2 6340,4398.46 S5.4
NetR26_2: R26.2 R30.1 S6.4 | length 187.4
  Bottom Layer w10: R30.1 R26.2 5566.22,4462.28 S6.4
NetR27_2: R27.2 R31.1 S7.4 | length 180
  Bottom Layer w10: R31.1 R27.2 S7.4
NetR28_2: R28.2 R33.1 S8.4 | length 187.7
  Bottom Layer w10: R33.1 R28.2 2598.11,3671.61 S8.4
NetR29_2: R29.2 R34.1 S9.4 | length 182.7
  Bottom Layer w10: R34.1 R29.2 1840,3608.46 S9.4
NetR32_2: R32.2 R36.1 S11.4 | length 187.7
  Bottom Layer w10: R36.1 R32.2 2598.11,4461.61 S11.4
NetR35_2: R35.2 R37.1 S10.4 | length 187.7
  Bottom Layer w10: R37.1 R35.2 1080,3608.46 S10.4
NetR38_2: R38.2 R55.1 S12.4 | length 180
  Bottom Layer w10: R55.1 R38.2 S12.4
NetR39_2: R39.2 R56.1 S13.4 | length 180
  Bottom Layer w10: R56.1 R39.2 S13.4
NetU1_1: U1.1 U1.2 U2.11 | length 1636.4
  Top Layer w10: v1(3597,3230) 3597,3032.04 3712.04,2917 3837.21,2917 3933.21,2821 v1(4077,2821)
  Bottom Layer w10: v1(3597,3230) 3597,3191 3639.42,3148.58 U2.11 ; v1(4077,2821) 4077,2818 4127,2768 4127,2564 4166,2525 U1.2 U1.1
NetU1_3: U1.3 U7.3 | length 3346.8
  Top Layer w10: U7.3@1470,2780 1930,2780 2008.11,2701.89 2120.12,2701.89 2266.79,2701.89 2727.68,2241 4023,2241 4304,2522 4304,2548 4331,2575 v1(4370,2575)
  Bottom Layer w10: v1(4370,2575) U1.3
NetU1_5: U1.5 U7.4 | length 4199.7
  Top Layer w10: U7.4@1470,2622.52 1366.41,2622.52 1341,2647.93 1341,2798 1466,2923 1601,2923 ; U7.4@1720.12,3101.89 1601,2982.77 1601,2923 ; v1(4362,2677) 4323.47,2677 4287,2640.53 4287,2529.04 4015.96,2258 2734.72,2258 2140.83,2851.89 1672.11,2851.89 1601,2923
  Bottom Layer w10: v1(4362,2677) 4356,2677 4354,2675 U1.5
NetU1_6: U1.6 U1.7 U2.12 | length 1346.8
  Top Layer w10: v1(3653,3246) 3653,3000.08 3719.08,2934 3844.25,2934 3914.25,2864 v1(4122,2864)
  Bottom Layer w10: v1(3653,3246) 3653,3189 3673.73,3168.27 U2.12 ; v1(4122,2864) 4122,2858 4205,2775 U1.7 U1.6
NetU1_8: U1.8 U1.9 U2.13 | length 1430.5
  Top Layer w10: v1(3707,3219) 3707,2970.12 3726.12,2951 3851.29,2951 3898.29,2904 4171,2904 v1(4172,2903)
  Bottom Layer w10: v1(3707,3219) 3805.3,3219 U2.13 ; v1(4172,2903) 4172,2898 4222,2848 4581.57,2848 U1.8 U1.9
NetU1_10: U1.10 U8.3 | length 2295.5
  Top Layer w10: v1(4785,2676) 5284,3175 5585,3175 5665,3095 5665,2885 5558.11,2778.11 5556.89,2778.11 ; U8.3@5209.88,2778.11 5556.89,2778.11 ; U8.3@5860,2700 5635,2700 5556.89,2778.11
  Bottom Layer w10: U1.10 4655.57,2676 v1(4785,2676)
NetU1_12: U1.12 U8.4 | length 1309.2
  Top Layer w10: v1(4785,2575) 4866,2656 5034,2656 5034,2821 5106,2893 5253,2893 U8.4@5460,3100 ; 5035,2655 5070,2620 5209.25,2620 U8.4@5209.88,2620.63
  Bottom Layer w10: U1.12 v1(4785,2575)
NetU1_13: U1.13 U1.14 U2.10 | length 1960.5
  Top Layer w10: v1(3556,3190) 3556,3049 3705,2900 3830.17,2900 3969.17,2761 v1(4074,2761)
  Bottom Layer w10: v1(3556,3190) 3617.1,3128.9 U2.10 ; v1(4074,2761) 4074,2561 4239,2396 4621.13,2396 4654.57,2429.43 U1.14 U1.13
NetU2_14: U2.14 U6.21 | length 516.8
  Bottom Layer w10: U6.21 3558,3566 3824.64,3299.36 3824.64,3220.43 U2.14
NetU2_17: U2.17 U6.24 | length 1478.3
  Top Layer w10: v1(2947,3368) 2948,3369 v1(3845,3369)
  Bottom Layer w10: U6.24 2813,3566 2785,3538 2785,3433 2850,3368 v1(2947,3368) ; v1(3845,3369) 3883.69,3330.31 3883.69,3222.21 U2.17
NetU2_18: U2.18 U3.5 | length 2467.1
  Top Layer w10: U3.5 3539,2435.06 3539,2595.57 3584.43,2641 3871.57,2641 3896,2665.43 3896,2762.04 3809.04,2849 3365.08,2849 3265,2949.08 3265,3212 3375,3322 3856,3322 v1(3905,3371)
  Bottom Layer w10: U2.18 v1@3905.16,3367.16
NetU2_20: U2.20 U3.1 | length 2532.2
  Top Layer w10: U3.1 3617.8,2560.8 3664,2607 3885.65,2607 3930,2651.35 3930,2776.12 3823.12,2883 3379.17,2883 3299,2963.17 3299,3197.92 3389.08,3288 3947,3288 v1(4030,3371)
  Bottom Layer w10: U2.20 3944.53,3285.53 v1(4030,3371)
NetU2_21: U2.21 U6.18 | length 996
  Top Layer w10: v1(3571,3716) 3571,3661.92 3812.92,3420 4048,3420 4093,3375 v1(4093,3371)
  Bottom Layer w10: U6.18 v1(3571,3716) ; U2.21 3964.21,3278.17 3968.68,3282.64 3968.68,3282.72 4007.96,3322 4044,3322 v1(4093,3371)
NetU2_22: U2.22 U6.15 | length 1301.6
  Top Layer w10: v1(3600,3868) 3600,3656.96 3819.96,3437 4116.96,3437 4163,3390.96 v1(4163,3332)
  Bottom Layer w10: U6.15 3501,3868 v1(3600,3868) ; U2.22 3983.9,3273.81 3985.68,3275.59 3985.68,3275.68 4015,3305 4051.04,3305 4078.04,3332 v1(4163,3332)
NetU2_31: U2.31 U6.29 | length 3010.3
  Top Layer w10: v1(2748,3816) 3061,4129 3693.96,4129 3743,4079.96 3743,3538 3825,3456 4122,3456 4387,3191 v1(4387,3110)
  Bottom Layer w10: v1(2748,3816) 2864,3816 U6.29@2865,3815 ; U2.31 4227.16,3050.16 4285,3108 4286,3107 4289,3110 v1(4387,3110)
NetU2_39: U2.39 U3.2 | length 900.5
  Top Layer w10: U3.2 3598.11,2383.89 3613,2369 3779,2369 3831,2421 3831,2504.04 3902.96,2576 v1(3983,2576)
  Bottom Layer w10: v1(3983,2576) 3983.9,2576.9 U2.39
NetU2_41: U2.41 U3.3 | length 904.4
  Top Layer w10: U3.3 3578.43,2379.53 3605.96,2352 3786.04,2352 3848,2413.96 3848,2497 3877,2526 v1(3905,2526)
  Bottom Layer w10: v1(3905,2526) 3905,2629 3904.69,2629.31 3944.53,2669.14 U2.41
NetU2_42: U2.42 U6.27 | length 2126.4
  Top Layer w10: v1(2744,3719) 2744,3446.04 3358.04,2832 3802,2832 3856,2778 v1(3856,2682)
  Bottom Layer w10: v1(2744,3719) 2861,3719 U6.27@2865,3715 ; v1(3856,2682) 3856,2750 3924.84,2818.84 U2.42
NetU2_43: U2.43 U6.30 | length 2322.7
  Top Layer w10: v1(2694,3860) 2694,3472 3351,2815 3776.96,2815 3796,2795.96 v1(3796,2681)
  Bottom Layer w10: v1(2694,3860) 2699,3865 U6.30@2865,3865 ; v1(3796,2681) 3796,2718 3905.16,2827.16 U2.43 U2.43@3905.79,2898.94
NRST: P7.5 R13.2 U2.7 | length 4553.2
  Bottom Layer w10: U2.7 3754.41,3070 R13.2 3507.5,3125.5 3457,3176 2663,3176 2493.5,3006.5 2493.5,2137.5 2561,2070 4643,2070 P7.5
SWCLK: P7.2 U2.37 | length 921
  Bottom Layer w10: U2.37 4023.27,2529.73 P7.2
SWDIO: P7.4 U2.34 | length 1684.8
  Bottom Layer w10: U2.34 4216.19,2991.1 4273.08,3048 4648,3048 4829,2867 4829,2447 4610,2228 P7.4@4610,2125
pads on no net: A1.1 P7.6 S2.1 S2.2 S3.1 S3.2 S4.1 S4.2 S5.1 S5.2 S6.1 S6.2 S7.1 S7.2 S8.1 S8.2 S9.1 S9.2 S10.1 S10.2 S11.1 S11.2 S12.1 S12.2 S13.1 S13.2 U2.2 U2.3 U2.4 U2.5 U2.6 U2.27 U2.28 U2.29 U2.32 U2.38 U6.2 U6.4 U6.5 U6.7 U6.8 U6.16 U6.32 U6.33 U6.35 U6.36 U6.37 U6.38 U6.40 U6.41 U7.2@1620.12,3101.89 U7.7 U8.7

## Polygon pours and split planes (outlines as drawn)
GND on Bottom Layer "Bottom Layer-GND" (solid, pour order 12): 1068.16,2023.84 614,2478 597,2478 603,2484 603,4566 1046,5009 1046,5015 1052,5009 6115,5009 6588.28,4535.72 6588.28,2454 6540,2454 6109.84,2023.84
GND on Top Layer "Top Layer-GND" (solid, pour order 14): 603,4583 644,4708 733,4873 901.5,4965.5 1040,5003 6114,5003 6120,4997 6280,4985.63 6410,4867 6491.5,4785.5 6576,4548 6562.64,2365.79 6410,2188 6308,2103.5 6169,2052 1087,2052 1070,2035 879.5,2103.5 703,2247 653,2330 609,2478
3V3 on 3V3 Plane (split plane): 173 vertices, not listed, extent 608.3,2043.87 6568.26,5003.82
GND on GND Plane (split plane): 173 vertices, not listed, extent 608.3,2043.87 6568.26,5003.82

## Silkscreen, mask and mechanical layers (free items; w line width, h text height)
Top Overlay:
  circle w16.54: c5456.59,2699.93 r50
  circle w16.54: c5456.59,2699.93 r500
  circle w16.54: c1719.97,2699.93 r50
  circle w16.54: c1719.97,2699.93 r500
  lines w10: 5450,3100 5460,3100
  lines w16.54: 588.28,2523.84 ccw(c1088.28,2523.84) 1088.28,2023.84 2338.28,2023.84 4838.28,2023.84 6088.28,2023.84 ccw(c6088.28,2523.84) 6588.28,2523.84 6588.28,4523.84 ccw(c6088.28,4523.84) 6088.28,5023.84 1088.28,5023.84 ccw(c1088.28,4523.84) 588.28,4523.84 588.28,2523.84 ; 776.67,3513.13 776.67,3898.96 1138.87,3898.96 1138.87,3513.13 776.67,3513.13 ; 776.67,4298.96 1138.87,4298.96 1138.87,4684.78 776.67,4684.78 776.67,4298.96 ; 1219.97,2199.93 1219.97,2699.93 1219.97,3199.93 1719.97,3199.93 2219.97,3199.93 2219.97,2699.93 2219.97,2199.93 1719.97,2199.93 1219.97,2199.93 ; 1538.87,3513.13 1538.87,3898.96 1900,3898.96 1900,3513.13 1538.87,3513.13 ; 1538.87,4298.96 1901.08,4298.96 1901.08,4684.78 1538.87,4684.78 1538.87,4298.96 ; 2301.08,3513.13 2663.28,3513.13 2663.28,3898.96 2301.08,3898.96 2301.08,3513.13 ; 2301.08,4298.96 2301.08,4684.78 2663.28,4684.78 2663.28,4298.96 2301.08,4298.96 ; 2863.28,2798.84 4313.28,2798.84 4313.28,4248.84 2863.28,4248.84 2863.28,2798.84 ; 4513.28,3513.13 4875.49,3513.13 4875.49,3898.96 4513.28,3898.96 4513.28,3513.13 ; 4513.28,4298.96 4513.28,4684.78 4875.49,4684.78 4875.49,4298.96 4513.28,4298.96 ; 4956.59,2199.93 5456.59,2199.93 5956.59,2199.93 5956.59,2699.93 5956.59,3199.93 5456.59,3199.93 4956.59,3199.93 4956.59,2699.93 4956.59,2199.93 ; 5275.49,3513.13 5275.49,3898.96 5637.69,3898.96 5637.69,3513.13 5275.49,3513.13 ; 5275.49,4298.96 5637.69,4298.96 5637.69,4684.78 5275.49,4684.78 5275.49,4298.96 ; 6037.69,3513.13 6399.9,3513.13 6399.9,3898.96 6037.69,3898.96 6037.69,3513.13 ; 6037.69,4298.96 6399.9,4298.96 6399.9,4684.78 6037.69,4684.78 6037.69,4298.96
  text "Daniel Olis" at 903,2404 h60 r90
  text "Remote Control R1" at 792,2394 h60 r90